# Allegro board Scooter_switch.brd
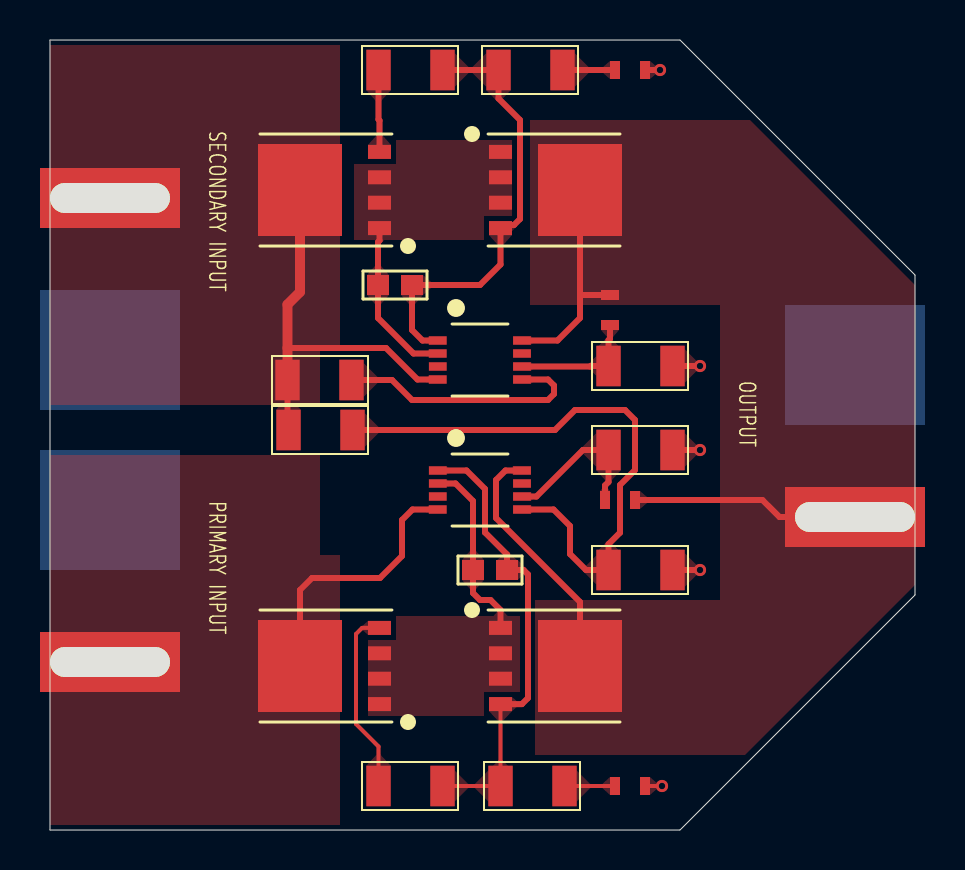
[diagram p0: board, top side]
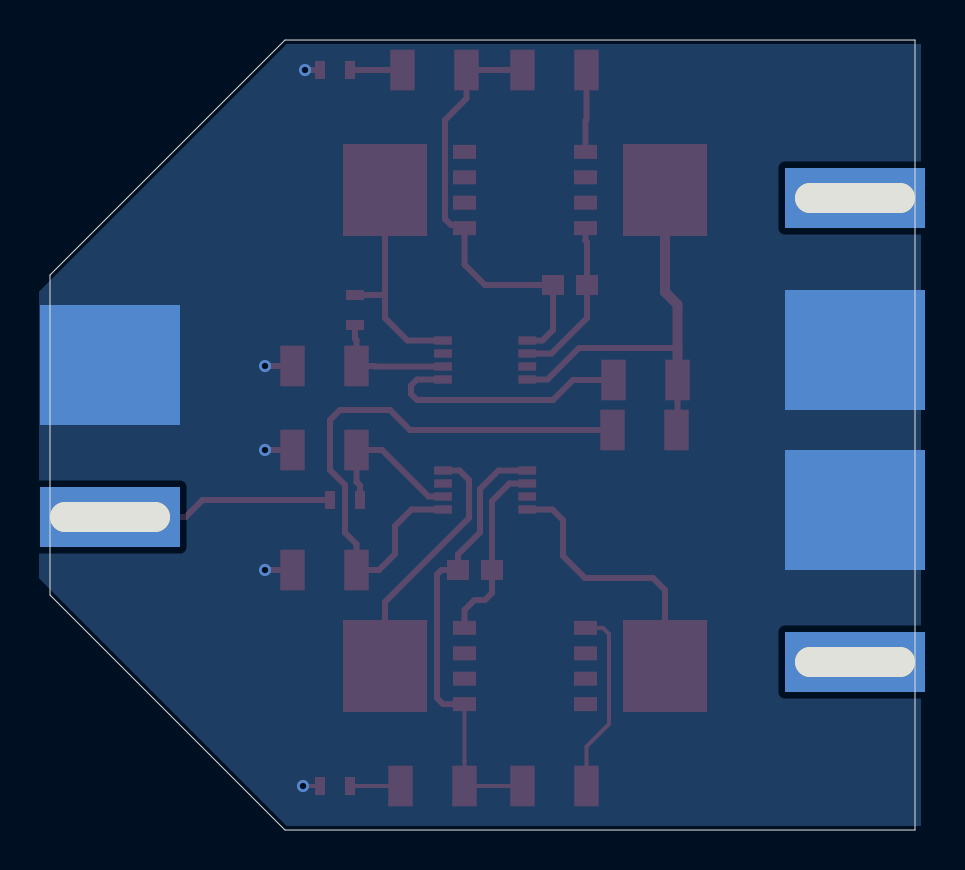
[diagram p1: board, bottom side, seen from below]

Outline 43.25 x 39.5 mm; copper layers: TOP, BOTTOM. Coordinates in mm from the lower left corner of the outline.
Outline path: 0,39.5 31.5,39.5 43.25,27.75 43.25,11.75 31.5,0 0,0 0,39.5

## Design rules (mm)
constraint set DEFAULT: 

## Placement (name value [footprint] x y rotation side)
C1  10nF  [0603C]  29 38 0 top
C2  4.7uF  [0603C]  28 26 270 top
C3  10nF  [0603C]  29 2.2 0 top
C4  4.7uF  [0603C]  28.5 16.5 180 top
D1  CZRU52C12  [0603R]  17.25 27.25 180 top
D2  CZRU52C12  [0603R]  22 13 180 top
J1  Dean_connector  [DEAN_CONN]  3 24 0 bottom
J2  Dean_connector  [DEAN_CONN]  3 16 180 bottom
J3  Dean_connector  [DEAN_CONN]  40.25 23.25 180 bottom
Q1  PSMN1R8-40YLC,115  [LFPAK56]  12.5 32 90 top
Q2  PSMN1R8-40YLC,115  [LFPAK56]  26.5 32 270 top
Q3  PSMN1R8-40YLC,115  [LFPAK56]  12.5 8.2 90 top
Q4  PSMN1R8-40YLC,115  [LFPAK56]  26.5 8.2 270 top
R1  10K  [1206R]  24 38 180 top
R2  10R  [1206R]  18 38 180 top
R3  1k  [1206R]  29.5 23.2 180 top
R4  10K  [1206R]  13.5 22.5 0 top
R5  10R  [1206R]  18 2.2 180 top
R6  10K  [1206R]  24.1 2.2 180 top
R8  1k  [1206R]  29.5 19 180 top
R9  2k7  [1206R]  13.5 20 180 top
R10  10K  [1206R]  29.5 13 180 top
U1  LTC4359  [8MSOP]  21.5 23.5 270 top
U2  LTC4359  [8MSOP]  21.5 17 270 top

## Library data of the parts
C1 C3 = F 0603
C2 C4 = 4.7uF 0603 10V 10%
D1 D2 = CZRU52C12
J1-J3 = Dean_connector
Q1-Q4 = MOSFET N 100A 40V
R1-R6 R8-R10 = R 1206
U1 U2 = LTC4359

## Footprints (pads in the part's own frame, mm; a bottom-side part is the same pattern mirrored in y, then rotated)
8MSOP
  rect 0.42x0.889 smd: 1(-0.975,-2.111) 2(-0.325,-2.111) 3(0.325,-2.111) 4(0.975,-2.111) 5(0.975,2.1) 6(0.325,2.1) 7(-0.325,2.1) 8(-0.975,2.1)
0603C
  rect 0.5x0.9 smd: 1(-0.75,0) 2(0.75,0)
0603R
  rect 1.1x1 smd: 1(-0.85,0) 2(0.85,0)
1206R
  rect 1.22x2.03 smd: 1(-1.626,0) 2(1.574,0)
DEAN_CONN
  rect 7x6 smd: 1(0,0)
  rect 7x3 hole 6x1.5: 2(0,-7.6)
LFPAK56
  rect 0.7x1.15 smd: 1(-1.905,-3.975) 2(-0.635,-3.975) 3(0.635,-3.975) 4(1.905,-3.975)
  rect 4.6x4.2 smd: 5(0,0)

## Nets
GND: C1.2 C3.2 J1.1 J2.1 J3.1 R3.1 R8.1 R10.1
IN_MAIN: J2.2 Q3.5 U2.4
IN_SIDE: J1.2 Q1.5 R4.1 R9.2 U1.4
OUT_POWER: C2.1 C4.1 J3.2 Q2.5 Q4.5 U1.8 U2.8
N00502: D1.2 Q1.1 Q1.2 Q1.3(S3) Q2.1 Q2.2 Q2.3(S3) U1.2
N00781: D1.1 Q2.4 R1.2 R2.1 U1.1
N00944: C1.1 R1.1
N01316: C2.2 R3.2 U1.6(VSS)
N01361: R4.2 U1.5
N02228: D2.2 Q3.1 Q3.2 Q3.3(S3) Q4.1 Q4.2 Q4.3(S3) U2.2
N02280: D2.1 Q4.4 R5.1 R6.2 U2.1
N02348: C3.1 R6.1
N02512: C4.2 R8.2 U2.6(VSS)
N02751: R9.1 R10.2 U2.5
N003140: Q1.4 R2.2
N021680: Q3.4 R5.2

Pads without a net: U1 3 7; U2 3 7

## Via types
v1: diameter 0.61, hole 0.33, TOP to BOTTOM, 5 vias

## Routing (per net, layer and track width the routed paths; a pad name or vN(x,y) marks a point on that pad's centre or on a via; arc(x,y) is an arc through that point)
GND: length 5.7
  TOP w0.2: C3.2 v1(30.6,2.2)
  TOP w0.3: R10.1 v1(32.5,13) ; C1.2 v1(30.5,38) ; R3.1 v1(32.5,23.2) ; R8.1 v1(32.5,19)
IN_MAIN: length 13.4
  TOP w0.3: U2.4 18.12,16.02 17.6,15.5 17.6,13.7 16.5,12.6 13.1,12.6 12.5,12 Q3.5
IN_SIDE: length 20.4
  TOP w0.3: R9.2 11.87,20.05 R4.1 ; 11.87,24.1 16.8,24.1 18.38,22.52 U1.4
  TOP w0.5: Q1.5 12.5,26.9 11.87,26.27 R4.1
OUT_POWER: length 35.2
  TOP w0.3: Q2.5 26.5,26.8 ; 26.5,26.8 26.55,26.75 C2.1 ; 26.5,26.8 26.5,25.6 25.38,24.48 U1.8 ; J3.2 36.47,15.65 35.62,16.5 C4.1 ; U2.8 22.77,17.98 22.3,17.5 22.3,15.6 26.5,11.4 Q4.5
N00502: length 8.3
  TOP w0.3: Q1.1 16.48,29.47 16.4,29.39 D1.2 16.4,25.6 18.18,23.82 U1.2
N00781: length 22.3
  TOP w0.3: 19.39,24.48 18.62,24.48 18.1,25 D1.1 21.5,27.25 22.52,28.27 Q2.4 22.68,30.25 23.2,30.25 23.5,30.55 23.5,35.5 22.43,36.57 R1.2 R2.1
N00944: length 2.6
  TOP w0.3: R1.1 C1.1
N01316: length 6.4
  TOP w0.3: C2.2 28,24.57 27.93,24.49 R3.2 27.04,23.2 27.01,23.18 U1.6
N01361: length 12.8
  TOP w0.3: R4.2 17.1,22.5 18.1,21.5 24.9,21.5 25.2,21.8 25.2,22.23 24.9,22.52 U1.5
N02228: length 9.3
  TOP w0.3: U2.2 20.27,17.32 21.15,16.45 D2.2 21.15,11.85 21.5,11.5 22.02,11.5 22.52,11 Q4.1
N02280: length 23.1
  TOP w0.2: R5.1 R6.2 22.53,3.44 22.52,3.44 22.52,6.3
  TOP w0.3: U2.1 20.82,17.98 21.75,17.05 21.75,14.88 22.85,13.78 D2.1 23.68,13 23.9,12.78 23.9,6.6 23.59,6.3 22.52,6.3
N02348: length 2.5
  TOP w0.2: R6.1 C3.1
N02512: length 7.9
  TOP w0.3: C4.2 27.75,17.23 27.93,17.4 R8.2 26.65,19 24.32,16.68 U2.6
N02751: length 29.2
  TOP w0.3: R9.1 25.25,20 26.25,21 28.75,21 29.25,20.5 29.25,18 28.5,17.25 28.5,14.87 27.93,14.29 R10.2 26.8,13 26,13.8 26,15.2 25.18,16.02 U2.5
N003140: length 4.1
  TOP w0.3: Q1.4 16.48,35.48 16.43,35.53 R2.2
N021680: length 9.4
  TOP w0.2: R5.2 16.43,4.17 15.3,5.3 15.3,9.8 15.61,10.11 Q3.4

## Copper pours and planes (outline as drawn; the poured copper is in the pictures)
GND on BOTTOM: -0.3,0.2 -0.3,39.3 31.42,39.3 43.8,26.92 43.8,12.58 31.42,0.2
IN_MAIN on TOP: 14.5,0.25 14.5,13.75 13.5,13.75 13.5,18.75 0,18.75 0,0.25
IN_SIDE on TOP: 14.5,24 14.5,39.25 0,39.25 0,21.25 13.5,21.25 13.5,24
OUT_POWER on TOP: 24,35.5 35,35.5 43.25,27.25 43.25,12.25 34.75,3.75 24.25,3.75 24.25,11.5 33.5,11.5 33.5,26.25 24,26.25
N00502 on TOP: 15.2,33.3 17.3,33.3 17.3,34.5 23.1,34.5 23.1,30.7 21.7,30.7 21.7,29.5 15.2,29.5
N02228 on TOP: 15.9,9.5 17.3,9.5 17.3,10.7 23.5,10.7 23.5,6.9 21.7,6.9 21.7,5.7 15.9,5.7

Small or netless copper shapes (teardrops, artwork), in the pictures only: 64 on TOP

## Text on the board
Ref Des/Silkscreen Top: SECONDARY INPUT | PRIMARY INPUT | OUTPUT
BODY_CENTER: FIGURE | FINISHED_SIZE | 0.3302 | 6.0x1.5 | TOLERANCE_DRILL | +0.0/-0.0 | +0.1/-0.1 | DRILL CHART: TOP to BOTTOM | ALL UNITS ARE IN MILLIMETERS | TOLERANCE_TRAVEL | - | PLATED | QTY | 5 | 3
